# Altium PCB DCFv2.PcbDoc
Units mil, origin at the board's own origin, x right, y up, seen from the top; angles counter-clockwise.
Board outline 3735 x 5060 mil, 2 copper layers (Top Layer, Bottom Layer); 14 components, 22 nets, 107 pads, 2 vias.
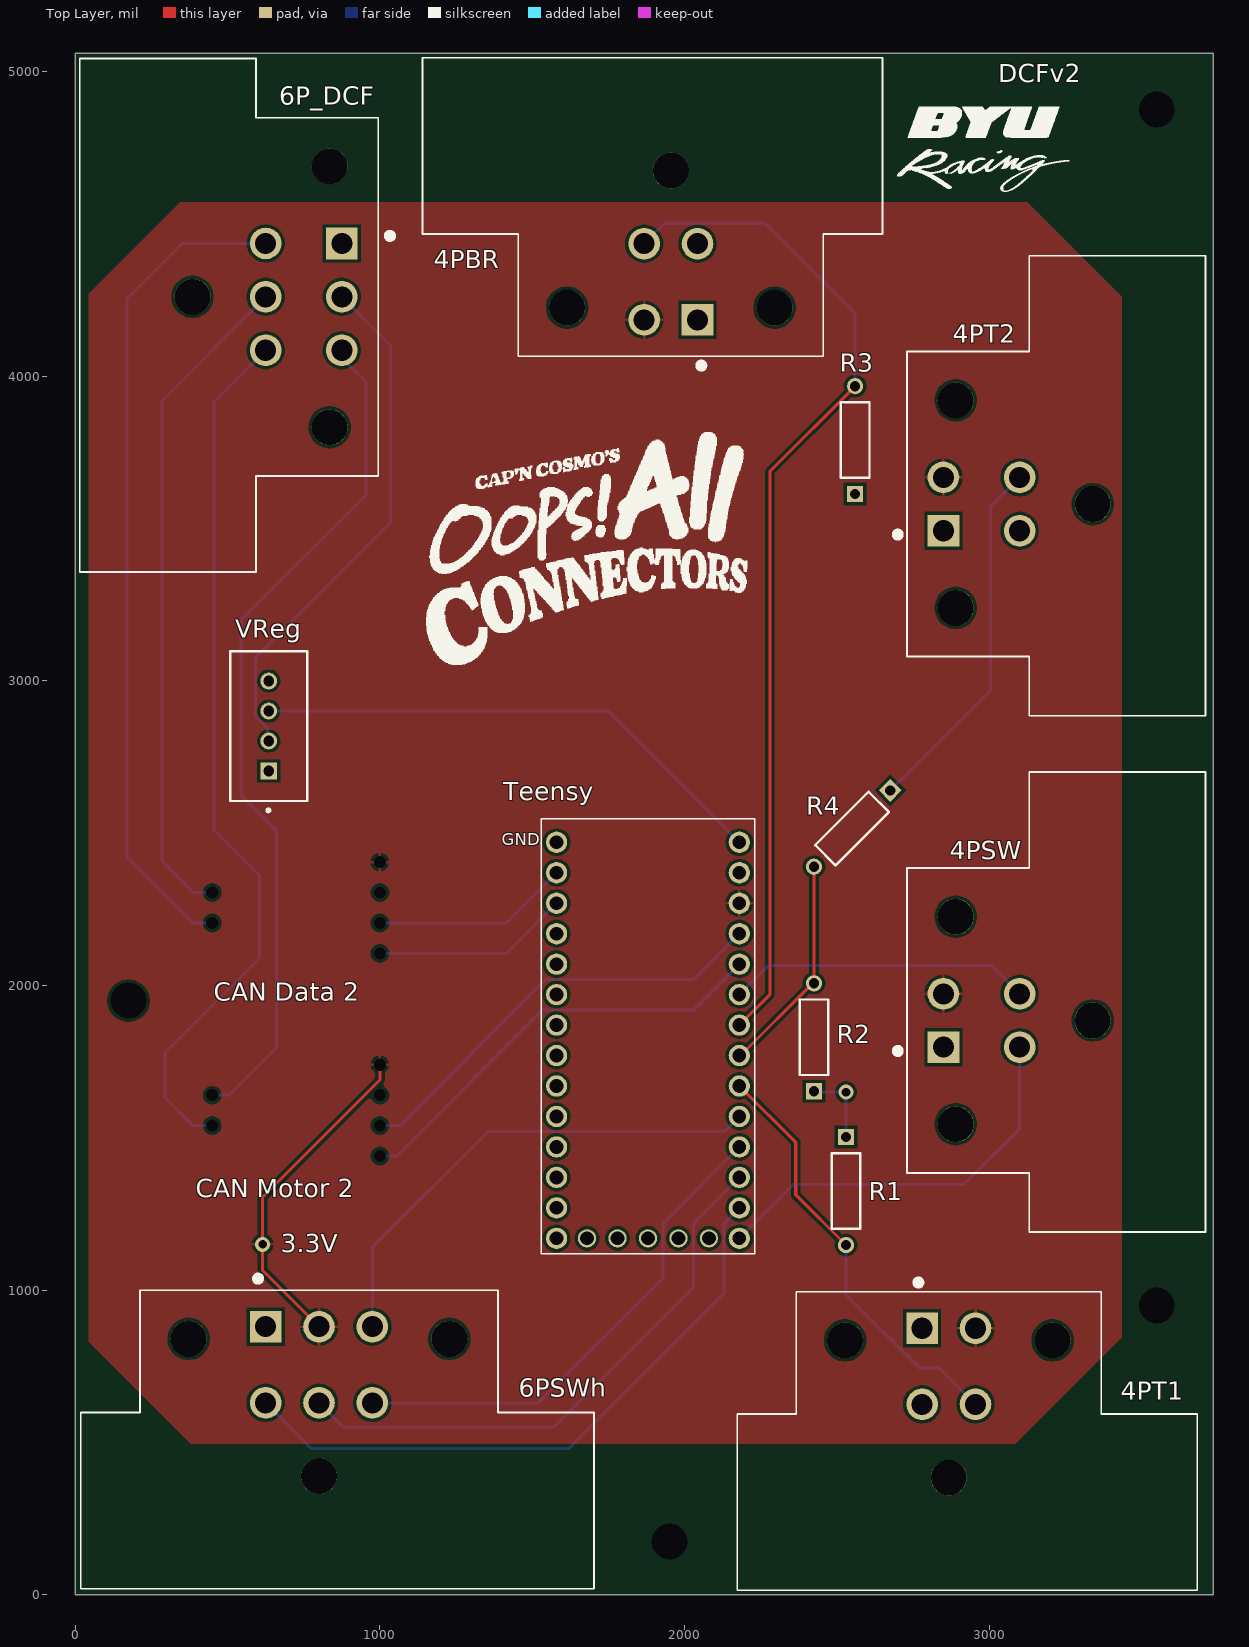
[diagram p0: Top Layer view]
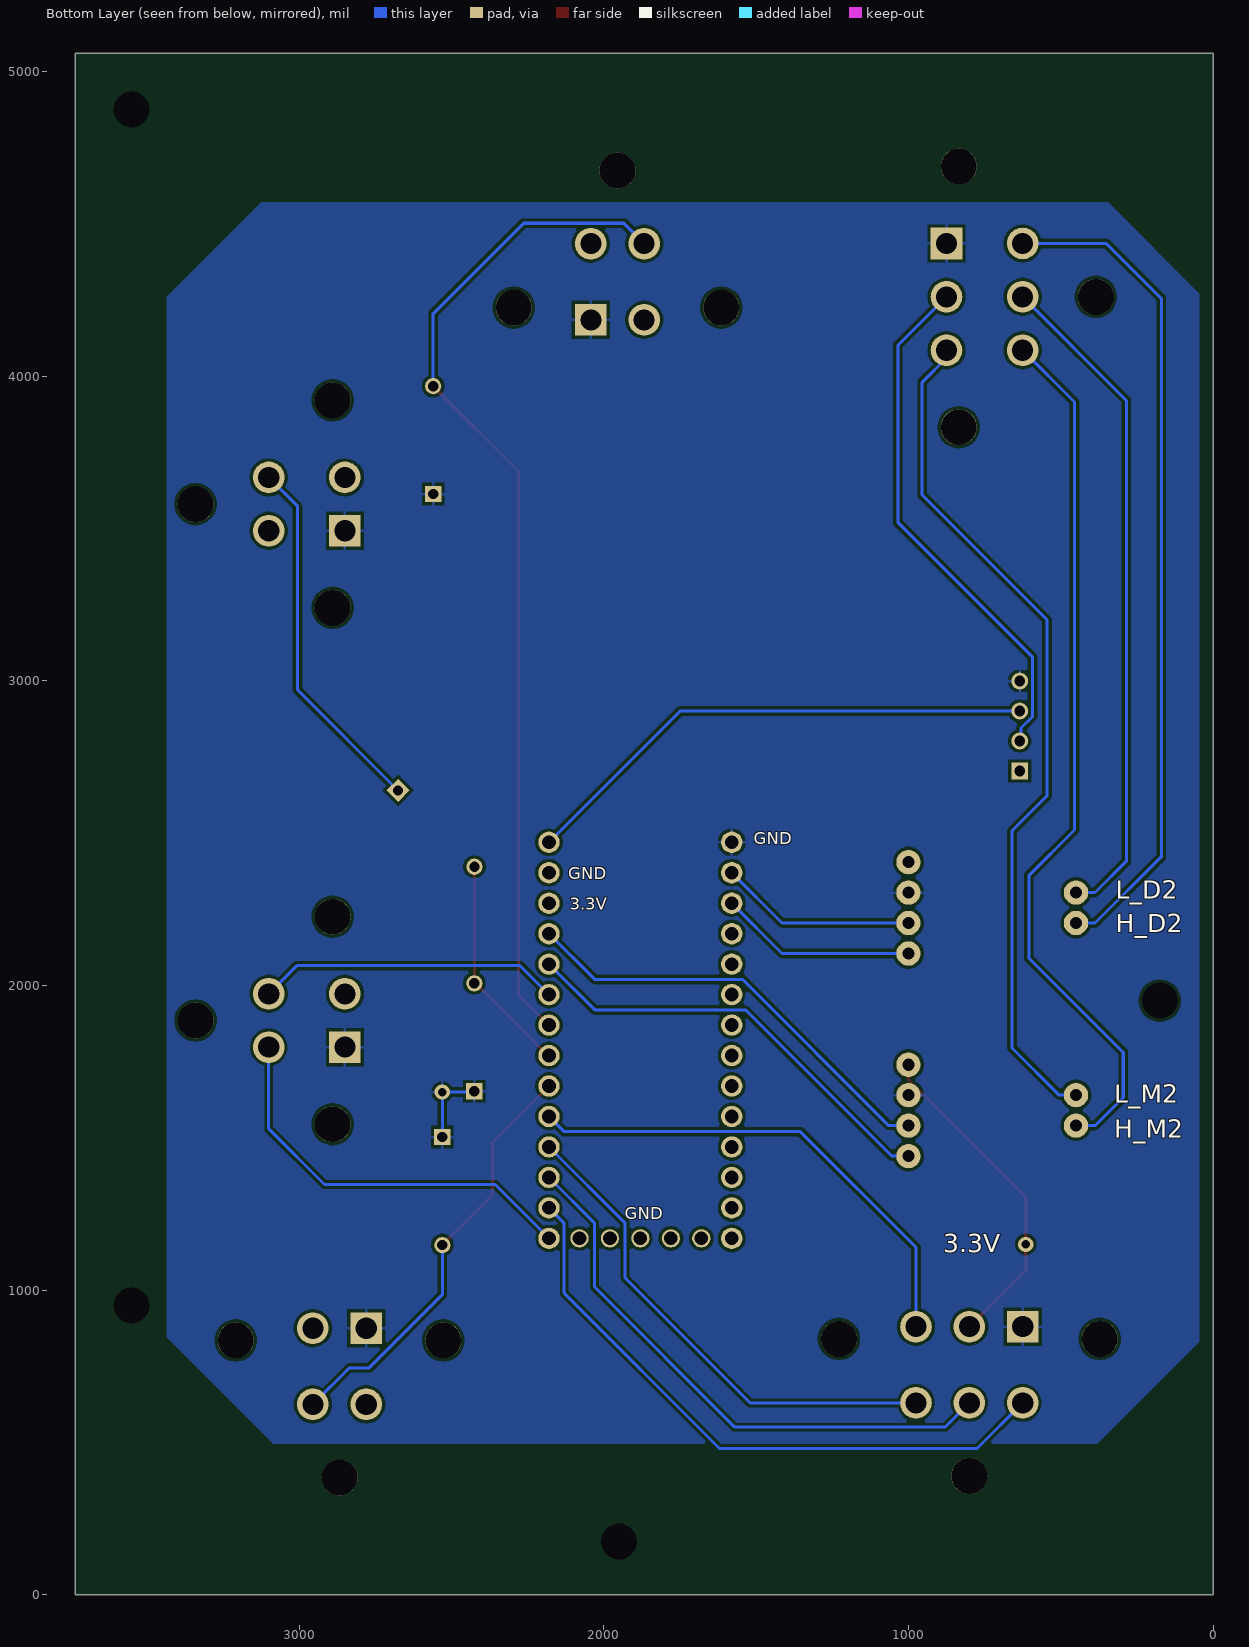
[diagram p1: Bottom Layer view, seen from below]

## Layer stack, top to bottom
Top Solder: solder mask 0.4, Solder Resist, Dk 3.5
Top Layer: signal copper 1.4
Dielectric 1: dielectric 12.6, FR-4, Dk 4.8
Bottom Layer: signal copper 1.4
Bottom Solder: solder mask 0.4, Solder Resist, Dk 3.5

## Board outline
0,0 3735,0 3735,5060 0,5060

## Design rules (kind name [scope] priority, off if disabled: settings)
Clearance [All] p1: gap=10 ignorepadtopadclearanceinfootprint=FALSE
HoleSize [All] p1: absolutevalues=TRUE maxlimit=157.48 minlimit=0.98 maxpercent=80.000 minpercent=20.000
PolygonConnect [All] p1: connectstyle=Relief reliefconductorwidth=10 reliefentries=4 polygonreliefangle="90 Angle" airgapwidth=10
RoutingVias [All] p1: holewidth=28 width=50 viastyle="Through Hole" minholewidth=28 minwidth=50 maxholewidth=28 maxwidth=50
SolderMaskExpansion [All] p1: expansion=4 istentingtop=FALSE
SupplyNets "Schematic Supply Nets" [InNet('GND')] p1: voltage=0.000
Width [All] p1: maxlimit=10 minlimit=10 preferedwidth=10
29 further rules are at their usual default settings.

## Components (designator, comment, footprint, x,y, rotation, side; value= is the part's Value field where it differs from the comment)
4PBR "DT13-4P" TE_DT13-4P 1955,4434.84 r270 top
4PSW "DT13-4P" TE_DT13-4P 3099.84,1885 r180 top
4PT1 "DT13-4P" TE_DT13-4P 2867.4,625 r90 top
4PT2 "DT13-4P" TE_DT13-4P 3099.84,3580 r180 top
6P_DCF "DT13-6P" TE_DT13-6P 625.16,4260.35 r0 top
6PSWh "DT13-6P" TE_DT13-6P 800.2,630 r90 top
"CAN Data 2" "CAN Module" "CAN Module-Footprint-1" 1000,2405 r180 top
"CAN Motor 2" "CAN Module" "CAN Module-Footprint-1" 1000,1740 r180 top
R1 "MFR-25FBF5210K" RESA60-630X240 2530,1325 r270 top
R2 "MFR-25FBF5210K" RESA60-630X240 2425,1830 r90 top
R3 "MFR-25FBF5210K" RESA60-630X240 2560,3790 r90 top
R4 "MFR-25FBF5210K" RESA60-630X240 2550,2515 r225 top
Teensy "DEV-15583" MODULE_DEV-15583 1880,1820 r0 top
VReg "B04B-XASK-1(LF)(SN)" FP-B04B-XASK-1_LF_SN-MFG 635,2851.57 r270 top

## Footprints (in the part's own frame and the unit in brackets; to place one, negate y for a bottom-side part, rotate by r counter-clockwise, add the part's x,y. Pads: shape width x height; smd on the part's side, far side on the other; paste and mask are expansions set on the pad)
"CAN Module-Footprint-1" [mil]
  round 0 / inner round 60 / far side round 80 hole 40: 1(0,300) 2(0,200) 3(0,100) 4(0,0) 5(550,200) 6(550,100)
FP-B04B-XASK-1_LF_SN-MFG [mm]
  rect 1.4x1.4 hole 0.9 paste-2539.97 mask+0: 1(3.75,0)
  round 1.4 hole 0.9 paste-2539.97 mask+0: 2(1.25,0) 3(-1.25,0) 4(-3.75,0)
  silkscreen extent -6.25,-3.2 7.15,3.2, body extent -6.35,-3.3 6.35,3.3, height 0.25
MODULE_DEV-15583 [mil]
  round 70 hole 45.16: 0(-300,550) 1(-300,450) 2(-300,350) 3(-300,250) 3.3V_2(300,450) 4(-300,150) 5(-300,50) 6(-300,-50) 7(-300,-150) 8(-300,-250) 9(-300,-350) 10(-300,-450) 11(-300,-550) 12(-300,-650) 13(300,-650) 14(300,-550) 15(300,-450) 16(300,-350) 17(300,-250) 18(300,-150) 19(300,-50) 20(300,50) 21(300,150) 22(300,250) 23(300,350) G1(-300,650) G3(300,550) VIN(300,650)
  round 60 hole 45.16: 3.3V_1(-100,-650) G2(0,-650) ON-OFF(200,-650) PGM(100,-650) VBAT(-200,-650)
  silkscreen extent -350,-700 350,728
RESA60-630X240 [mm] "Axial Resistor, 2-Leads, Dia 2.4mm, Body Length 6.3mm"
  rect 1.35x1.35 hole 0.85: 1(-4.5,0)
  round 1.35 hole 0.85: 2(4.5,0)
  silkscreen extent -3.15,-1.2 3.15,1.2, body extent -3.15,-1.2 3.15,1.2, height 2.4
TE_DT13-4P [mm]
  rect 2.64x2.64 hole 1.76: 1(6.35,2.225)
  round 2.64 hole 1.76: 2(6.35,-2.225) 3(0,-2.225) 4(0,2.225)
  round 2.99 hole 2.99 unplated: ""(-6.1,0) ""(5.33,8.65) ""(5.33,-8.65)
  silkscreen extent -15.5,-20.71 10.41,17.64
TE_DT13-6P [mm]
  rect 2.64x2.64 hole 1.76: 1(6.35,4.45)
  round 2.64 hole 1.76: 2(6.35,0) 3(6.35,-4.45) 4(0,-4.45) 5(0,0) 6(0,4.45)
  round 2.99 hole 2.99 unplated: ""(-6.1,0) ""(5.33,-10.87) ""(5.33,10.87)
  silkscreen extent -15.5,-22.93 10.61,19.87

## Part data
4PBR 4PSW 4PT1 4PT2: "DT13 Series, 4.44mm Pitch 4 Way 2 Row Right Angle PCB Header, Solder Termination", Package=None, Availability=Unavailable, MF="TE Connectivity", MP=DT13-4P, Price=None, SnapEDA_Link=https://www.snapeda.com/parts/DT13-4P/TE%20Connectivity%20Deutsch%20Connectors/view-part/2708791/?ref=snap, TE_purchase_URL=https://www.te.com/usa-en/product-DT13-4P.html?te_bu=Cor&te_type=disp&te_campaign=seda_glo_cor-seda-global-disp-prtnr-fy19-seda-model-bom-cta_sma-317_1&elqCampaignId=32493
6P_DCF 6PSWh: "DT13 Series, 4.44mm Pitch 6 Way 2 Row Right Angle PCB Header, Solder Termination", Package=None, Availability=Unavailable, DigiKey-Purchase-URL=https://snapeda.com/shop?store=DigiKey&id=1897474, EU_RoHS_Compliance=Compliant, MF="TE Connectivity", MP=DT13-6P, Price=None, SnapEDA_Link=https://www.snapeda.com/parts/DT13-6P/TE%20Connectivity%20Deutsch%20Connectors/view-part/1897474/?ref=snap
"CAN Data 2" "CAN Motor 2": library part CMP-00030-00003-1, "CAN waveshare"
R1 R2 R3 R4: library part CMP-1659-00074-2, "Axial Resistor, 10 KOhm, +/- 1%, 0.25 W, -55 to 155 degC, 2-Pin THD, RoHS, Bulk", Case\/Package=Axial, Manufacturer=Yageo, Max Operating Temperature=155degC, Max Power Dissipation=250mW, Min Operating Temperature=-55degC, Package Description="2-Pin Axial Lead, Dia 2.4 mm, Body Length 6.3 mm", Package Quantity=200, Package Reference=MFR-25, Resistance=10KOhm, Temperature Coefficient=100ppm\/degreesC, Tolerance=1%, Voltage Rating=250V, Voltage Rating (DC)=200V, Composition=MetalFilm, Datasheet URL=http://www.yageo.com/documents/recent/Yageo%20LR_MFR_2013.pdf, Datasheet Version=04/2013, Lead Free=LeadFree, Length=0.248inch, Manufacturer URL=http://www.yageo.com/, Military Standard=Not, Mount=ThroughHole, Mounting Technology=ThroughHole, Number of Terminations=2, Packaging=Bulk, Power Rating=250mW, RoHSCompliant=True, Termination=Axial
Teensy: "RT1062 Teensy 4.0 i.MX ARMÂ® CortexÂ®-M7 MPU Embedded Evaluation Board", Package=None, Digi-Key_Part_Number=1568-DEV-15583-ND, Digi-Key_Purchase_URL=https://www.digikey.com/product-detail/en/sparkfun-electronics/DEV-15583/1568-DEV-15583-ND/10384551?utm_source=snapeda&utm_medium=aggregator&utm_campaign=symbol, MF="SparkFun Electronics", MP=DEV-15583, SnapEDA_Link=https://www.snapeda.com/parts/DEV-15583/SparkFun%20Electronics/view-part/4001229/?ref=snap
VReg: library part CMP-17439-000018-1, "CONN HEADER VERT 4POS 2.5MM", Current Rating=3A, Manufacturer=JST, Temperature="-25°C to +85°C", Temperature Range High=+85°C, Temperature Range Low=-25°C, Voltage Rating=250V, Automotive=No, Category=Conn, ComponentLink2Description=Datasheet, ComponentLink2URL=http://www.jst-mfg.com/product/pdf/eng/eXA1.pdf, Conn Gender=Male, Conn Orientation=Straight, Contact Material=Tin,Copper, Device Class L1=Connectors, Device Class L2="Headers and Wire Housings", Device Class L3=unset, Digikey Description="CONN HEADER VERT 4POS 2.5MM", Height=8.8mm, Lead Free=Yes, Manufacturer Part Number=B04B-XASK-1(LF)(SN), Number of Contacts=4, Number of Rows=1, Octopart=https://octopart.com/b04b-xask-1%28lf%29%28sn%29-jst-3990149, Package=B04B-XASK-1(LF)(SN), Pitch=2.5mm, RoHS=TRUE

## Free pads (board coordinates)
  round 60 hole 118.11: 2(175,1950) 2(1950,175) 2(3550,950) 2(3550,4875)

## Via types
v1: diameter 50, hole 28, Top Layer to Bottom Layer, 2 vias

## Nets (pads, with @x,y where several pads share a name; then routed paths per layer and width w, separated by ;. In a path a pad name is that pad's centre, name@x,y a point inside that pad or via, vN(x,y) a via of type N, cw(c..) or ccw(c..) an arc to the next point about the centre after c; other vN are vias at no path point)
3.3V: 4PBR.2 4PSW.2 4PT1.2 4PT2.2 6PSWh.2 "CAN Data 2.4" "CAN Motor 2.4" Teensy.3.3V_2 | length 1096.2
  Top Layer w10: 6PSWh.2 615,1065.2 v1(615,1150) 615,1304.5 1000,1689.5 1000,1740
5V: Teensy.VIN VReg.3 | length 1723.4
  Bottom Layer w10: VReg.3 1749.21,2900.79 Teensy.VIN
12V: 6P_DCF.2 VReg.2 | length 1725.1
  Bottom Layer w10: VReg.2 630.68,2806.68 630.68,2844.92 592.44,2883.16 592.44,3077.44 1035,3520 1035,4100.51 6P_DCF.2
A1: 4PT1.3 R1.2 Teensy.18 | length 1404.1
  Top Layer w10: Teensy.18 2365,1485 2365,1312.83 R1.2
  Bottom Layer w10: R1.2 2530,985 2770,745 2835,745 4PT1.3
A2: R2.2 R4.2 Teensy.19 | length 725.9
  Top Layer w10: Teensy.19 2183.92,1770 2421.08,2007.17 R2.2 2424.86,2007.3 2424.86,2389.59 R4.2
A3: 4PBR.3 R3.2 Teensy.20 | length 3335.7
  Top Layer w10: Teensy.20 2280,1970 2280,3687.17 R3.2
  Bottom Layer w10: 4PBR.3 1934.37,4501.81 2263.19,4501.81 2560,4205 R3.2
A4: 4PSW.3 Teensy.21 | length 997.5
  Bottom Layer w10: Teensy.21 2275,2065 3007.44,2065 4PSW.3
A5: 6PSWh.3 Teensy.17 | length 1642.9
  Bottom Layer w10: 6PSWh.3 975.39,1140.39 1355,1520 2130,1520 Teensy.17
A6: 6PSWh.4 Teensy.16 | length 1658
  Bottom Layer w10: 6PSWh.4 1520,630 1930,1040 1930,1220 Teensy.16
A7: 6PSWh.6 Teensy.14 | length 2079.1
  Bottom Layer w10: 6PSWh.6 775,480 1620,480 2130,990 2130,1220 Teensy.14
CANH_D2: 6P_DCF.6 "CAN Data 2.5" | length 2732.5
  Bottom Layer w10: 450,2205 387.5,2205 170,2422.5 170,4255 350.55,4435.55 6P_DCF.6
CANH_M2: 6P_DCF.4 "CAN Motor 2.5" | length 2907
  Bottom Layer w10: 450,1540 387.5,1540 295,1632.5 295,1780 605,2090 605,2360 455,2510 455,3915 6P_DCF.4
CANL_D2: 6P_DCF.5 "CAN Data 2.6" | length 2201.2
  Bottom Layer w10: 450,2305 387.5,2305 285,2407.5 285,3920.2 6P_DCF.5
CANL_M2: 6P_DCF.3 "CAN Motor 2.6" | length 2814.9
  Bottom Layer w10: 450,1640 505,1640 660,1795 660,2507.5 545,2622.5 545,3200 955,3610 955,3979.9 875.16,4059.74 6P_DCF.3
CRX10: "CAN Motor 2.2" Teensy.23 | length 1441
  Bottom Layer w10: 1000,1540 1064.88,1540 1544.88,2020 2030,2020 Teensy.23
CRX20: "CAN Data 2.2" Teensy.0 | length 648.3
  Bottom Layer w10: 1000,2205 1415,2205 Teensy.0
CTX10: "CAN Motor 2.1" Teensy.22 | length 1441
  Bottom Layer w10: 1000,1440 1055,1440 1535,1920 2030,1920 Teensy.22
CTX20: "CAN Data 2.1" Teensy.1 | length 648.3
  Bottom Layer w10: 1000,2105 1415,2105 Teensy.1
D1: 4PSW.4 Teensy.13 | length 1336.5
  Bottom Layer w10: Teensy.13 2356.73,1346.73 2916.73,1346.73 3099.84,1529.84 4PSW.4
GND: 4PBR.1 4PSW.1 4PT1.1 4PT2.1 6P_DCF.1 6PSWh.1 "CAN Data 2.3" "CAN Motor 2.3" R1.1 R2.1 R3.1 Teensy.G1 VReg.4 | length 265.1
  Bottom Layer w10: R2.1 2427.83,1650 v1(2530,1650) R1.1 R1.1@2522.17,1510
Net4PT2_3: 4PT2.3 R4.1 | length 1203.2
  Bottom Layer w10: R4.1 3005,2970 3005,3572.76 4PT2.3
RX1: 6PSWh.5 Teensy.15 | length 1875.6
  Bottom Layer w10: 6PSWh.5 880.2,550 1570,550 2030,1010 2030,1220 Teensy.15
pads on no net: 4PBR. 4PBR.4 4PSW. 4PT1. 4PT1.4 4PT2. 4PT2.4 6P_DCF. 6PSWh. Teensy.2 Teensy.3 Teensy.3.3V_1 Teensy.4 Teensy.5 Teensy.6 Teensy.7 Teensy.8 Teensy.9 Teensy.10 Teensy.11 Teensy.12 Teensy.G2 Teensy.G3 Teensy.ON-OFF Teensy.PGM Teensy.VBAT VReg.1

## Polygon pours and split planes (outlines as drawn)
GND on Bottom Layer "GND_L02_P001" (solid, pour order 1): 345,4570 3125,4570 3435,4260 3435,3785 3435,845 3085,495 380,495 45,830 45,4270
3.3V on Top Layer "3.3V_L01_P000" (solid, pour order 0): 345,4570 3125,4570 3435,4260 3435,3785 3435,845 3085,495 380,495 45,830 45,4270

## Silkscreen, mask and mechanical layers (free items; w line width, h text height)
Top Overlay:
  drawing of 33 lines, arcs and shapes, not listed
  text "DCFv2" at 3030,4965 h60
  text "3.3V" at 675,1125 h60
Bottom Overlay:
  text "GND" at 1507,2463 h40
  text "GND" at 2117,2348 h40
  text "L_D2" at 320,2285 h60
  text "3.3V" at 2112,2248 h40
  text "H_D2" at 320,2175 h60
  text "L_M2" at 325,1615 h60
  text "H_M2" at 325,1500 h60
  text "GND" at 1932,1233 h40
  text "3.3V" at 885,1125 h60

## Text inside footprints (layer, text, board x,y; h text height)
Teensy: Top Overlay "GND" at 1400,2460 h40; Mechanical 13 "GND" at 1405,2460 h32